# EAGLE board dengen1 - コピー (EAGLE 9.6.2)

Size 160 x 100 mm. Coordinates in mm from the lower left corner, seen from the top.
Outline: 0,0 160,0 160,100 0,100 0,0
Copper layers (1*16): Top 0.035mm / dielectric 1.5mm / Bottom 0.035mm
Design rules "default": minimum track width 6mil, minimum drill 0.35mm, track to track 6mil, track to pad 6mil, pad to pad 6mil, via to via 6mil, smd to smd 6mil, copper to edge 40mil, drill to drill 6mil, minimum pad ring 10mil, minimum via ring 8mil, stop-mask expansion 4mil, vias tented up to drill 0mil, thermal gap 10mil
Net classes: 1 SIGNAL: width 0.152 mm, drill 0.152 mm, clearance 0.152 mm; 2 POWER_H: width 0.305 mm, drill 0.152 mm, clearance 0.152 mm; 3 POWER_L: width 0.457 mm, drill 0.152 mm, clearance 0.152 mm; 4 GND: width 0.305 mm, drill 0.152 mm, clearance 0.152 mm

## Footprints (pad centres in the part's own frame; a part is rotated, then mirrored left to right if it is on the bottom)
GY-68 = drill 1.2: P1 -5,4; P2 -5,1.46; P3 -5,-1.08; P4 -5,-3.62
2X10 = drill 0.8: P$1 0,1.27; P$2 0,-1.27; P$3 -2.54,1.27; P$4 -2.54,-1.27; P$5 -5.08,1.27; P$6 -5.08,-1.27; P$7 -7.62,1.27; P$8 -7.62,-1.27; P$9 -10.16,1.27; P$10 -10.16,-1.27; P$11 -12.7,1.27; P$12 -12.7,-1.27; P$13 -15.24,1.27; P$14 -15.24,-1.27; P$15 -17.78,1.27; P$16 -17.78,-1.27; P$17 -20.32,1.27; P$18 -20.32,-1.27; P$19 -22.86,1.27; P$20 -22.86,-1.27
C025-024X044 = drill 0.813 octagon: 1 -1.27,0; 2 1.27,0
2PIN = drill 1.2 square: P$1 -1.27,0; P$2 1.27,0
DO35-7 = drill 0.813 long: A 3.81,0; C -3.81,0
5V1A_M78AR05-1 = drill 0.9 pad 1.27 square: GND 0,0; VIN 2.54,0; VOUT -2.54,0
3.3V1A_M78AR033-1 = drill 0.9 pad 1.27 square: GND 0,0; VIN 2.54,0; VOUT -2.54,0
IM920_IM920C = smd 0.3 x 1.1: $P1 -1.75,-13.45; $P2 -1.75,-9.55; $P3 -2.25,-13.45; $P4 -2.25,-9.55; $P5 -2.75,-13.45; $P6 -2.75,-9.55; $P7 -3.25,-13.45; $P8 -3.25,-9.55; $P9 -3.75,-13.45; $P10 -3.75,-9.55; $P11 -4.25,-13.45; $P12 -4.25,-9.55; $P13 -4.75,-13.45; $P14 -4.75,-9.55; $P15 -5.25,-13.45; $P16 -5.25,-9.55; $P17 -5.75,-13.45; $P18 -5.75,-9.55; $P19 -6.25,-13.45; $P20 -6.25,-9.55 | hole 2.5: 7,-12 | hole 2: -7,14
LED5MM = drill 0.813 octagon: A -1.27,0; K 1.27,0
HC49/S = drill 0.813: 1 -2.413,0; 2 2.413,0
0204/7 = drill 0.813 octagon: 1 -3.81,0; 2 3.81,0
SRIDE_SWITCH = drill 1: L -2.5,0; LR 0,0; R 2.5,0
ATMEGA328P = drill 0.6: AREF 17.78,7.62; AVCC 20.32,7.62; D1TX 5.08,0; D2 7.62,0; D3 10.16,0; D4 12.7,0; D5 25.4,0; D6 27.94,0; D7 30.48,0; D8 33.02,0; D9 33.02,7.62; D14 12.7,7.62; D15 10.16,7.62; D16 7.62,7.62; D17 5.08,7.62; GND1 17.78,0; GND2 15.24,7.62; MISOD12 25.4,7.62; MOSID11 27.94,7.62; PB6 20.32,0; PB7 22.86,0; RESET 0,0; RXD0 2.54,0; SCKD13 22.86,7.62; SCLD19 0,7.62; SDAD18 2.54,7.62; SSD10 30.48,7.62; VCC 15.24,0
2SJ681 = drill 1: DRAIN 0,0; GATE 2.54,0; SOURCE -2.54,0
2SK4017 = drill 1: DRAIN 0,0; GATE 2.54,0; SOURCE -2.54,0

## Placement (x,y rotation side)
BMP1  BMP180  [GY-68]  -40.64,5.08 0 top  (outside the outline)
BORD2  [2X10]  -31.75,53.34 0 top  (outside the outline)
BORD3  [2X10]  -15.24,62.23 0 top  (outside the outline)
C1  10uF  [C025-024X044]  -21.59,71.12 0 top  (outside the outline)
C2  3.3uF  [C025-024X044]  -68.58,62.23 0 top  (outside the outline)
C3  3.3uF  [C025-024X044]  -16.51,71.12 0 top  (outside the outline)
C4  22p  [C025-024X044]  -26.67,71.12 0 top  (outside the outline)
C5  22p  [C025-024X044]  -31.75,71.12 0 top  (outside the outline)
C6  22p  [C025-024X044]  -36.83,71.12 0 top  (outside the outline)
C7  22p  [C025-024X044]  -41.91,71.12 0 top  (outside the outline)
CON2  [2PIN]  -16.51,54.61 0 top  (outside the outline)
CON5  [2PIN]  -25.4,54.61 0 top  (outside the outline)
D1  1N4148DO35-7  [DO35-7]  -55.88,71.12 0 top  (outside the outline)
DCDC1  [5V1A_M78AR05-1]  -52.07,6.35 0 top  (outside the outline)
DCDC2  [3.3V1A_M78AR033-1]  -63.5,6.35 0 top  (outside the outline)
IM2  IM920_IM920C  [IM920_IM920C]  -22.86,15.24 0 top  (outside the outline)
LED4  [LED5MM]  -48.26,63.5 0 top  (outside the outline)
LED6  [LED5MM]  -60.96,63.5 0 top  (outside the outline)
Q1  16mhz  [HC49/S]  -57.15,45.72 0 top  (outside the outline)
Q2  16mhz  [HC49/S]  -68.58,45.72 0 top  (outside the outline)
R1  [0204/7]  -57.15,76.2 0 top  (outside the outline)
R2  [0204/7]  -67.31,76.2 0 top  (outside the outline)
R3  [0204/7]  -17.78,82.55 0 top  (outside the outline)
R5  10k  [0204/7]  -27.94,82.55 0 top  (outside the outline)
R6  10k  [0204/7]  -38.1,82.55 0 top  (outside the outline)
R7  10k  [0204/7]  -48.26,82.55 0 top  (outside the outline)
R8  1k  [0204/7]  -58.42,82.55 0 top  (outside the outline)
R9  100k  [0204/7]  -68.58,82.55 0 top  (outside the outline)
R10  1k  [0204/7]  -17.78,87.63 0 top  (outside the outline)
R12  100  [0204/7]  -27.94,87.63 0 top  (outside the outline)
R13  100  [0204/7]  -38.1,87.63 0 top  (outside the outline)
SRIDE_SWTCH1  SRIDE_SWITCH  [SRIDE_SWITCH]  -24.13,76.2 0 top  (outside the outline)
SRIDE_SWTCH2  SRIDE_SWITCH  [SRIDE_SWITCH]  -39.37,76.2 0 top  (outside the outline)
SW1  SRIDE_SWITCH  [SRIDE_SWITCH]  -48.26,76.2 0 top  (outside the outline)
U$1  ATMEGA238P  [ATMEGA328P]  -48.26,31.75 0 top  (outside the outline)
U$2  2SJ681-PCH  [2SJ681]  -62.23,95.25 270 top  (outside the outline)
U$3  2SK4017-NCH  [2SK4017]  -69.85,95.25 270 top  (outside the outline)
U$4  2SJ681-PCH  [2SJ681]  -66.04,95.25 270 top  (outside the outline)
U$5  2SJ681-PCH  [2SJ681]  -58.42,95.25 270 top  (outside the outline)
U$6  ATMEGA238P  [ATMEGA328P]  -48.26,41.91 0 top  (outside the outline)

## Library data of the parts
BMP1 = BMP180
BORD2 BORD3 = PinSocket
C1-C7 = rcl; SPICEPREFIX: C
CON2 CON5 = XR Connector
D1 = diode
DCDC1 DCDC2 = DC-DC
IM2 = CANSAT12th
LED4 LED6 = led
Q1 Q2 = crystal; OC_FARNELL: 1667008; OC_NEWARK: unknown
R1-R3 R5-R10 R12 R13 = rcl; SPICEPREFIX: R
SRIDE_SWTCH1 SRIDE_SWTCH2 SW1 = Sride Switch
U$1 U$6 = atmega328p
U$2-U$5 = mosfet

## Nets
+3V3 [POWER_L]: BMP1.P1 BORD2.P$9 BORD2.P$10 BORD3.P$6 BORD3.P$15 C3.1 DCDC2.VOUT IM2.$P17 R3.2 R5.2 R6.2 U$3.DRAIN
+5V [POWER_H]: BORD2.P$11 BORD2.P$12 BORD3.P$8 BORD3.P$13 C2.1 DCDC1.VOUT DCDC2.VIN R1.1 R2.1 U$1.AVCC U$1.VCC U$6.AVCC U$6.VCC
+5V1 [POWER_H]: DCDC1.VIN U$5.DRAIN
BORDRX [SIGNAL]: BORD3.P$10 BORD3.P$11 U$6.D17
BORDTX [SIGNAL]: BORD3.P$9 BORD3.P$12 U$6.D16
FP [POWER_H]: CON5.P$1 D1.A R10.2 U$2.GATE U$3.GATE U$4.GATE
FP_CHECKER [SIGNAL]: C1.1 R8.2
GND [GND]: BMP1.P2 BORD2.P$8 BORD2.P$13 BORD3.P$5 BORD3.P$16 C1.2 C2.2 C3.2 C4.2 C5.2 C6.2 C7.2 CON2.P$1 CON5.P$2 DCDC1.GND DCDC2.GND IM2.$P18 LED4.K LED6.K R7.1 R10.1 SRIDE_SWTCH1.LR SRIDE_SWTCH2.LR SW1.LR U$1.GND1 U$1.GND2 U$6.GND1 U$6.GND2
IM_BUSY [SIGNAL]: IM2.$P1 U$6.D6
IM_RESET [SIGNAL]: IM2.$P19 U$6.D5
LED [SIGNAL]: IM2.$P15
LED1.0 [SIGNAL]: R13.2 U$6.D2
LED1.1 [SIGNAL]: R12.2 U$6.D3
N$1 [SIGNAL]: U$2.DRAIN U$4.DRAIN
N$2 [SIGNAL]: C6.1 Q2.2 U$6.PB6
N$3 [SIGNAL]: D1.C R9.2 U$4.SOURCE U$5.SOURCE
N$4 [SIGNAL]: C7.1 Q2.1 U$6.PB7
N$5 [SIGNAL]: C5.1 Q1.1 U$1.PB7
N$6 [SIGNAL]: R1.2 SRIDE_SWTCH1.R U$1.RESET
N$7 [SIGNAL]: C4.1 Q1.2 U$1.PB6
N$8 [SIGNAL]: R2.2 SRIDE_SWTCH2.R U$6.RESET
N$9 [SIGNAL]: LED6.A R13.1
N$10 [SIGNAL]: LED4.A R12.1
N$11 [SIGNAL]: BORD2.P$14
N$14 [SIGNAL]: R7.2 R8.1 U$3.SOURCE
N$20 [SIGNAL]: BORD3.P$17
RAW: CON2.P$2 U$2.SOURCE
RX_IM [SIGNAL]: IM2.$P6 U$6.D7
SCL [SIGNAL]: BMP1.P3 R6.1 U$6.SCLD19
SDA [SIGNAL]: BMP1.P4 R5.1 U$6.SDAD18
SERVO [SIGNAL]: BORD3.P$7 BORD3.P$14 R3.1 U$6.D15
SW [SIGNAL]: R9.1 SW1.L U$5.GATE
TX_IM [SIGNAL]: IM2.$P7 U$6.D8

## Tracks (layer width: path | path; a pad name or v marks a point on that pad's centre or on a via)
+3V3  (11 unrouted)
+5V  (12 unrouted)
+5V1  (1 unrouted)
BORDRX  (2 unrouted)
BORDTX  (2 unrouted)
FP  (5 unrouted)
FP_CHECKER  (1 unrouted)
GND  (27 unrouted)
IM_BUSY  (1 unrouted)
IM_RESET  (1 unrouted)
LED1.0  (1 unrouted)
LED1.1  (1 unrouted)
N$1  (1 unrouted)
N$2  (2 unrouted)
N$3  (3 unrouted)
N$4  (2 unrouted)
N$5  (2 unrouted)
N$6  (2 unrouted)
N$7  (2 unrouted)
N$8  (2 unrouted)
N$9  (1 unrouted)
N$10  (1 unrouted)
N$14  (2 unrouted)
RAW  (1 unrouted)
RX_IM  (1 unrouted)
SCL  (2 unrouted)
SDA  (2 unrouted)
SERVO  (3 unrouted)
SW  (2 unrouted)
TX_IM  (1 unrouted)